# Altium PCB PA_8CH_USER_IFC.PcbDoc (part 2 of 2)
Units mil, origin at the board's own origin, x right, y up, seen from the top; angles counter-clockwise.
Board outline 3070.87 x 1771.65 mil, 2 copper layers (Top Layer, Bottom Layer), stack 61.855 mil thick; 75 components, 89 nets, 332 pads, 99 vias.
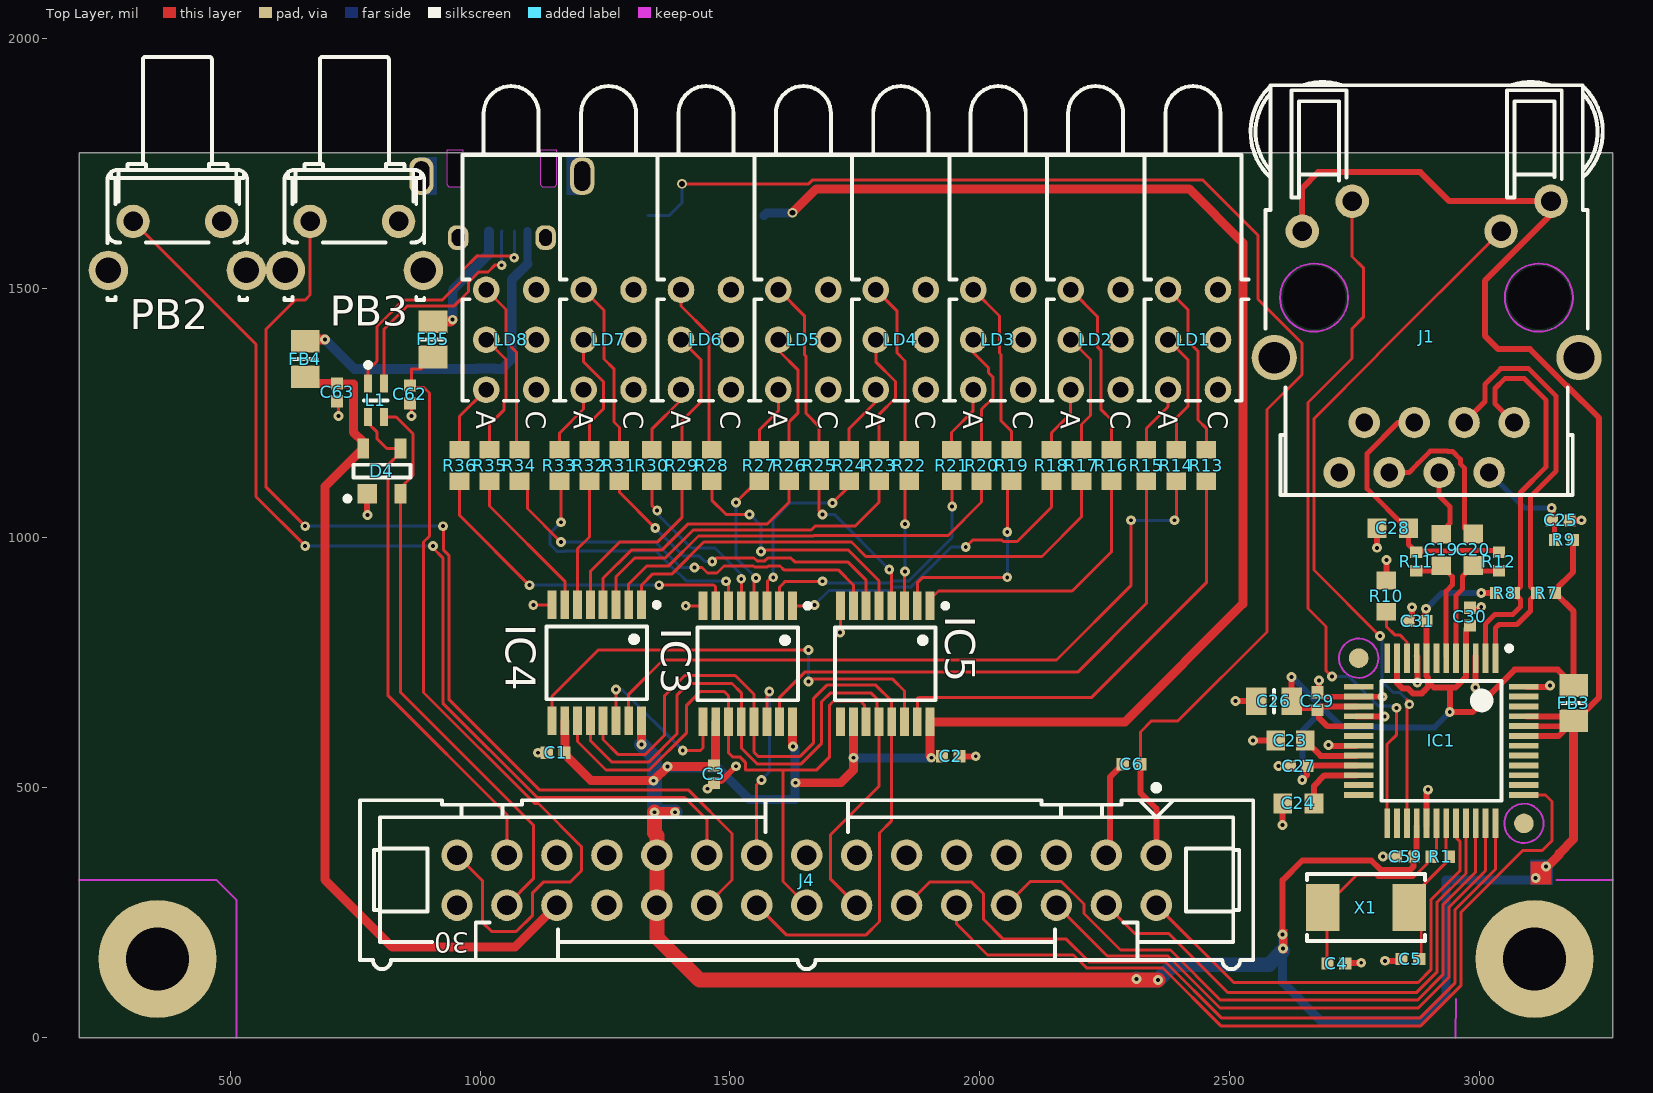
[diagram p0: Top Layer view]

## Via types
v1: diameter 19.68, hole 7.87, Top Layer to Bottom Layer, tented both sides, 97 vias
v2: diameter 19.68, hole 11.81, Top Layer to Bottom Layer, 2 vias

## Nets (pads, with @x,y where several pads share a name; then routed paths per layer and width w, separated by ;. In a path a pad name is that pad's centre, name@x,y a point inside that pad or via, vN(x,y) a via of type N, cw(c..) or ccw(c..) an arc to the next point about the centre after c; other vN are vias at no path point) (continued)
RJ45_YEL: (continued)
  Bottom Layer w6: v1(2705,723) 2738.54,723 2796.77,664.77 2798.22,663.32 2832.32,663.32 v1@2834.64,661
  other v1: 2834,660
SPI1_MISO: IC1.34 J4.8 | length 1348.8
  Top Layer w6: J4.8 2101.05,312.46 2163.31,312.46 2208.66,267.11 2208.66,248.03 2281.69,175 2381.85,175 2482.05,74.8 2876.2,74.8 2927,125.61 2927,265.31 2992.91,331.23 IC1.34@2992.91,423.31
SPI1_MOSI: IC1.35 J4.6 | length 1229.7
  Top Layer w6: J4.6 2255.5,163 2376.88,163 2480.83,59.06 2877.95,59.06 2939,120.1 2939,260.34 3012.6,333.94 IC1.35@3012.6,423.31
SPI1_NSS: IC1.32 J4.2 | length 938.9
  Top Layer w6: J4.2 2508.27,110.24 2877.69,110.24 2903,135.55 2903,275.25 2961,333.25 2961,392.7 2953.54,400.15 IC1.32@2953.54,423.31
SPI1_SCK: IC1.33 J4.4 | length 1067.1
  Top Layer w6: J4.4 2309.84,208.66 2377.95,208.66 2496.06,90.55 2874.97,90.55 2915,130.58 2915,270.28 2973.23,328.51 IC1.33@2973.23,423.31
pads on no net: IC1.7 IC1.12 IC1.13 IC1.18 IC1.23 IC1.24 IC1.26 IC1.38 IC1.39 IC1.40 IC1.41 IC1.42 IC1.46 IC1.47 IC1.FTG1 IC1.FTG2 IC5.9 J1.7 J1.M1 J1.M2 J2.PastePad J4.23 J4.24

## Polygon pours and split planes (outlines as drawn)
GND on Bottom Layer "Top-No Net" (solid, remove dead copper, pour order 0): 219,1732.28 3228.35,1732.28 3228.35,39.37 219,39.37

## Keep-outs
Keep-Out Layer:
  lines w3.94: 196.85,314.96 472.44,314.96 511.81,275.59 511.81,0 ; 2737.42,1480.01 cw(c2669.31,1481.17) 2737.43,1482.03 ; 2952.76,0 2953,77 ; 3155,315 3267.72,314.96 ; 3187.42,1480.01 cw(c3119.31,1481.17) 3187.43,1482.03

## Other copper
Top Layer:
  rectangle net P3V3: 2599,169 2616,217
  rectangle net P3V3: 3103,306 3145,352
  rectangle net P3V3: 2301,105 2365,127
  rectangle net P3V3: 1339,440 1399,461
Bottom Layer:
  rectangle net P3V3: 3102,305 3147.56,356.22

## Silkscreen, mask and mechanical layers (free items; w line width, h text height)
Mechanical 1:
  lines w0.39: 196.85,0 2165.35,0 3267.72,0 3267.72,1771.65 196.85,1771.65 196.85,0

## Text inside footprints (layer, text, board x,y; h text height)
J2: Drill Drawing "0.85" at 984.17,1886.44 h39.37 r180; Drill Drawing "1.87" at 1029.16,1783.91 h39.37 r90; Drill Drawing "r0.2" at 1133.86,1665.35 h39.37 r180; Mechanical 8 "PCB end" at 874.02,1813.98 h19.68 r180
J4: Top Overlay "30" at 978.54,209.96 h40 r180; Mechanical 14 "30" at 978.54,209.96 h40 r180
LD1: Top Overlay "A" at 2356.97,1254.84 h39.37 r270; Top Overlay "C" at 2456.97,1254.84 h39.37 r270; Mechanical 14 "A" at 2356.1,1255.04 h39.37 r270; Mechanical 14 "C" at 2458.46,1255.04 h39.37 r270
LD2: Top Overlay "A" at 2161.97,1254.84 h39.37 r270; Top Overlay "C" at 2261.97,1254.84 h39.37 r270; Mechanical 14 "A" at 2161.1,1255.04 h39.37 r270; Mechanical 14 "C" at 2263.46,1255.04 h39.37 r270
LD3: Top Overlay "A" at 1966.97,1254.84 h39.37 r270; Top Overlay "C" at 2066.97,1254.84 h39.37 r270; Mechanical 14 "A" at 1966.1,1255.04 h39.37 r270; Mechanical 14 "C" at 2068.46,1255.04 h39.37 r270
LD4: Top Overlay "A" at 1771.97,1254.84 h39.37 r270; Top Overlay "C" at 1871.97,1254.84 h39.37 r270; Mechanical 14 "A" at 1771.1,1255.04 h39.37 r270; Mechanical 14 "C" at 1873.46,1255.04 h39.37 r270
LD5: Top Overlay "A" at 1576.97,1254.84 h39.37 r270; Top Overlay "C" at 1676.97,1254.84 h39.37 r270; Mechanical 14 "A" at 1576.1,1255.04 h39.37 r270; Mechanical 14 "C" at 1678.46,1255.04 h39.37 r270
LD6: Top Overlay "A" at 1381.97,1254.84 h39.37 r270; Top Overlay "C" at 1481.97,1254.84 h39.37 r270; Mechanical 14 "A" at 1381.1,1255.04 h39.37 r270; Mechanical 14 "C" at 1483.46,1255.04 h39.37 r270
LD7: Top Overlay "A" at 1186.97,1254.84 h39.37 r270; Top Overlay "C" at 1286.97,1254.84 h39.37 r270; Mechanical 14 "A" at 1186.1,1255.04 h39.37 r270; Mechanical 14 "C" at 1288.46,1255.04 h39.37 r270
LD8: Top Overlay "A" at 991.97,1254.84 h39.37 r270; Top Overlay "C" at 1091.97,1254.84 h39.37 r270; Mechanical 14 "A" at 991.1,1255.04 h39.37 r270; Mechanical 14 "C" at 1093.46,1255.04 h39.37 r270